# Altium PCB PCB2.PcbDoc
Units mm, origin at the board's own origin, x right, y up, seen from the top; angles counter-clockwise.
Board outline 25 x 89 mm, 2 copper layers (Top Layer, Bottom Layer); 12 components, 20 nets, 111 pads, 0 vias.
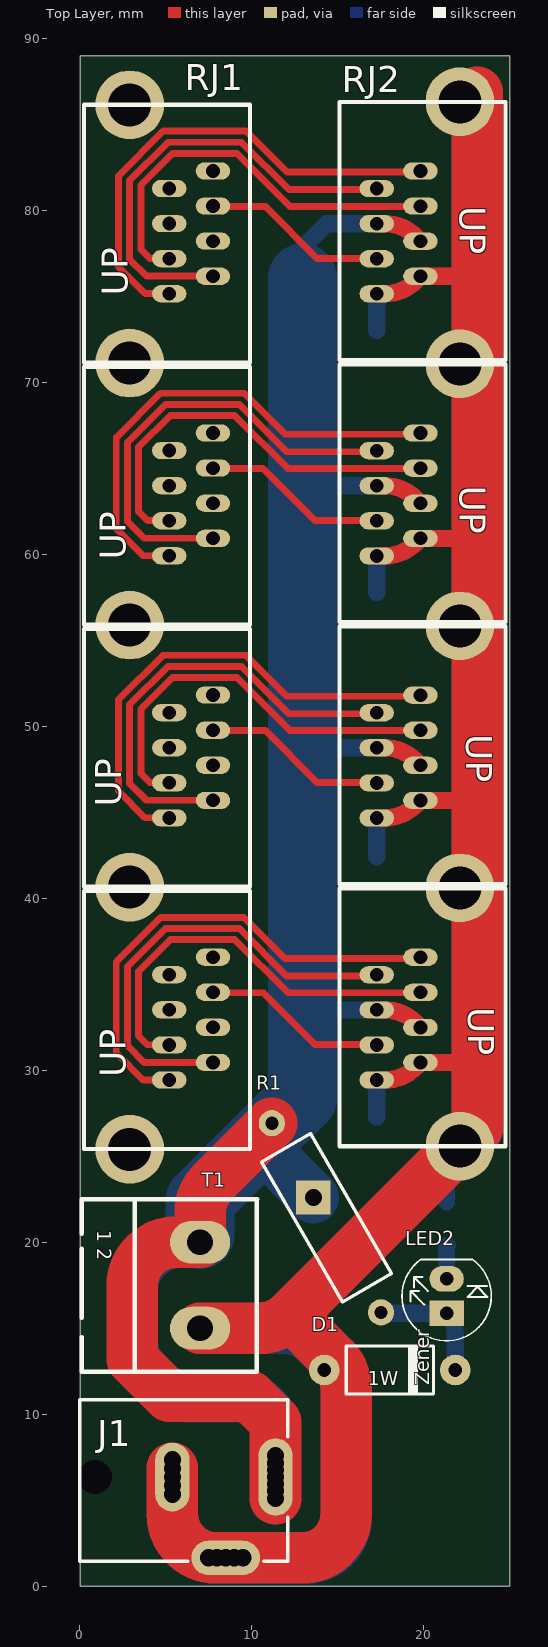
[diagram p0: Top Layer view]
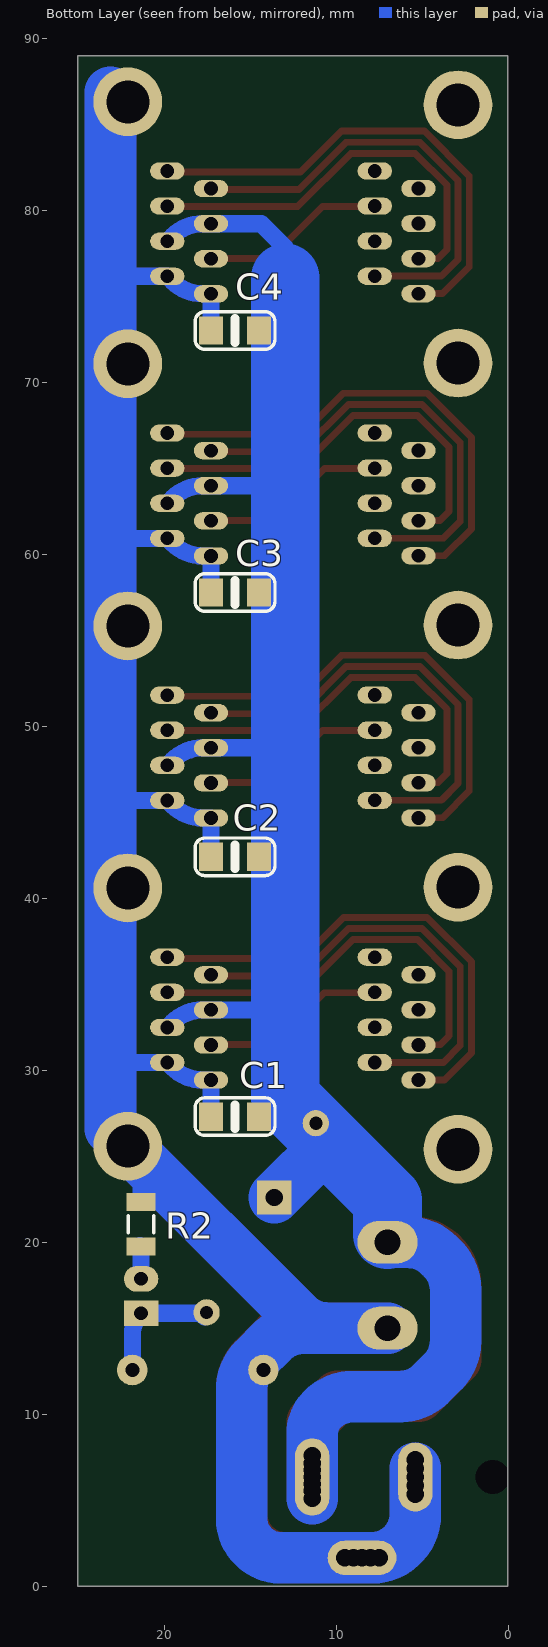
[diagram p1: Bottom Layer view, seen from below]
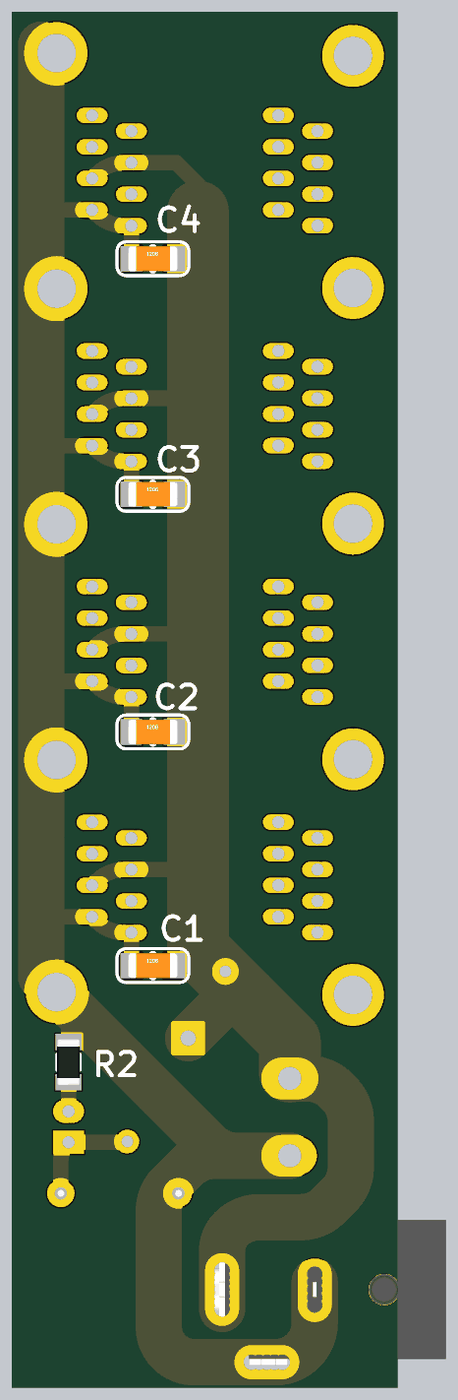
[diagram p2: 3D render of the assembled board from below, using the file's embedded part models]

## Layer stack, top to bottom
Top Solder: solder mask 0.0102, Solder Resist, Dk 3.5
Top Layer: signal copper 0.0356
Dielectric 1: dielectric 0.32, FR-4, Dk 4.8
Bottom Layer: signal copper 0.0356
Bottom Solder: solder mask 0.0102, Solder Resist, Dk 3.5

## Board outline
0.019,-0.003 25.019,-0.003 25.019,89 0.019,89

## Design rules (kind name [scope] priority, off if disabled: settings)
Clearance [All] p1: gap=0.25 ignorepadtopadclearanceinfootprint=FALSE
PolygonConnect [All] p1: connectstyle=Relief reliefconductorwidth=0.4 reliefentries=4 polygonreliefangle="90 Angle" airgapwidth=0.254
RoutingVias [All] p1: holewidth=0.711 width=1.27 viastyle="Through Hole" minholewidth=0.711 minwidth=1.27 maxholewidth=0.711 maxwidth=1.27
SolderMaskExpansion [All] p1: expansion=0.102
Width [All] p1: maxlimit=4 minlimit=0.254 preferedwidth=1.5
30 further rules are at their usual default settings.

## Components (designator, comment, footprint, x,y, rotation, side; value= is the part's Value field where it differs from the comment)
C1 "Capacitor SMD" "1206 Capacitor" 15.875,27.305 r180 bottom
C2 "Capacitor SMD" "1206 Capacitor" 15.875,42.418 r180 bottom
C3 "Capacitor SMD" "1206 Capacitor" 15.875,57.785 r180 bottom
C4 "Capacitor SMD" "1206 Capacitor" 15.875,73.025 r180 bottom
D1 "Diode Zener" "Diode 1W" 18.034,12.573 r0 top
J1 "Power Jack" "Power Jack" -3.111,6.35 r0 top locked
LED2 "Red" LED-5mm 21.339,15.875 r90 top
R1 "330R" Res-(1/2) 11.176,26.924 r300 top
R2 "330R" "RES 1206 (3216X08L)" 21.339,22.355 r270 bottom
RJ1 "" rj45-w57-4 5.207,29.44 r90 top locked
RJ2 "" rj45-w57-4 19.812,82.296 r270 top locked
T1 "Phoenix terminal" "phoenix terminal 2" -4.68,22.495 r270 top

## Footprints (in the part's own frame and the unit in brackets; to place one, negate y for a bottom-side part, rotate by r counter-clockwise, add the part's x,y. Pads: shape width x height; smd on the part's side, far side on the other; paste and mask are expansions set on the pad)
"1206 Capacitor" [mil]
  rect 55x65 smd: 1(-55,0) 2(55,0)
  silkscreen extent -92,-43 92,43, body extent -63,-31 63,31, height 39
"Diode 1W" [mil]
  round 70 hole 31.5: 1(-150,0) 2(150,0)
  silkscreen extent -100,-55 100,55, body extent -166,-52 165,52, height 131
LED-5mm [mm]
  rect 1.5x2 hole 0.8: 1(0,0)
  oval 1.5x2 hole 0.8: 2(2,0)
  silkscreen extent -1.6,-2.6 3.13,2.6
"phoenix terminal 2" [mm] "2 terminals"
  oval 2.5x3.5 hole 1.5: 1(2.493,11.684) 2(7.493,11.684)
  silkscreen extent 0,4.81 10.03,15
"Power Jack" [mm] "Power Adaptor Jack"
  round 1.5 hole 1: 1(14.5,-1.25) 1(14.5,-0.8) 1(14.5,-0.4) 1(14.5,0.4) 1(14.5,0.8) 1(14.5,1.25) 2(8.5,-1) 2(8.5,1) 2(8.5,-0.5) 2(8.5,0.5) 3(10.6,-4.7) 3(11.1,-4.7) 3(12.1,-4.7) 3(12.6,-4.7)
  oval 2x4.5 hole 1: 1(14.5,0)
  oval 2x4 hole 1: 2(8.5,0)
  oval 4x2 hole 1: 3(11.6,-4.7)
  round 1.9 hole 2: MH(4,0)
  silkscreen extent 3.11,-4.9 15.2,4.5, body extent 0,-4.9 15.2,4.5, height 11
"RES 1206 (3216X08L)" [mm] "Chip Resistor, 2-Leads, Body 3.2x1.6mm, IPC High Density _ (0.125 W)"
  rect 1.05x1.7 smd: 1(0,0) 2(2.596,0)
  silkscreen extent 0.8,-0.75 1.8,0.75, body extent -0.23,-0.76 2.82,0.76, height 0.6
Res-(1/2) [mil]
  round 60 hole 30: 1(0,0) 2(500,0)
  silkscreen extent 65,-65 435,65, body extent -12,-66 513,66, height 136
rj45-w57-4 [mm]
  oval 1x2 hole 0.8: 1(0,0) 2(1.02,-2.54) 3(2.04,0) 4(3.06,-2.54) 5(4.08,0) 6(5.1,-2.54) 7(6.12,0) 8(7.14,-2.54) 9(15.24,0) 10(16.26,-2.54) 11(17.28,0) 12(18.3,-2.54) 13(19.32,0) 14(20.34,-2.54) 15(21.36,0) 16(22.38,-2.54) 17(30.48,0) 18(31.5,-2.54) 19(32.52,0) 20(33.54,-2.54) 21(34.56,0) 22(35.58,-2.54) 23(36.6,0) 24(37.62,-2.54) 25(45.72,0) 26(46.74,-2.54) 27(47.76,0) 28(48.78,-2.54) 29(49.8,0) 30(50.82,-2.54) 31(51.84,0) 32(52.86,-2.54)
  round 4 hole 2.5: 33(-4.03,2.3) 34(11.21,2.3) 35(26.45,2.3) 36(41.69,2.3) 37(56.706,2.3)
  silkscreen extent -4.01,-4.7 56.71,4.95

## Part data
D1: "Zener Diode", Voltage=12V, Company=E.P.I.L, Design Date=2011/11/02, Designer="Saeid Jorablo"
LED2: library part LED, "LED", Adding Date=1387/12/22, Color=Red, Designer="Saeid Jorablo", Organazation=ControTec, Size="SMD 1206"
R1 R2: library part Resistor, "Resistor", Power="1/8 W", Tolerance=5%
RJ1 RJ2: library part RJ45-w57-4
T1: library part "Phoenix terminal 2", "Terminal 2 Pin", ComponentLinkURL=www.picpars.com, Designer="Seyed Mohsen Ghasemain", E-mail=picpars@gmail.com
C1 C2 C3 C4: =100nF
J1: Adding Date=10/21/2009, Company=Personal, Designer="Saeid Jorablo", Project Name=Laser

## Free pads (board coordinates)
  rect 2x2 hole 1: 3(13.589,22.606)

## Nets (pads, with @x,y where several pads share a name; then routed paths per layer and width w, separated by ;. In a path a pad name is that pad's centre, name@x,y a point inside that pad or via, vN(x,y) a via of type N, cw(c..) or ccw(c..) an arc to the next point about the centre after c; other vN are vias at no path point)
GND: C1.1 C2.1 C3.1 C4.1 D1.1 J1.2 J1.3 R2.1 RJ2.7 RJ2.8 RJ2.15 RJ2.16 RJ2.23 RJ2.24 RJ2.31 RJ2.32 RJ2.33 RJ2.34 RJ2.35 RJ2.36 RJ2.37 T1.2 | length 271.8
  Top Layer w1: RJ2.32 17.74,29.436 ccw(c17.74,31.976) 19.536,30.18 RJ2.31 22.865,30.456 cw(c22.865,30.104) 23.114,30.353 ; RJ2.24 17.74,44.676 ccw(c17.74,47.216) 19.536,45.42 RJ2.23 22.865,45.696 cw(c22.865,45.344) 23.114,45.593 ; RJ2.16 17.74,59.916 ccw(c17.74,62.456) 19.536,60.66 RJ2.15 22.865,60.936 cw(c22.865,60.584) 23.114,60.833 ; RJ2.8 17.74,75.156 ccw(c17.74,77.696) 19.536,75.9 RJ2.7 22.252,76.176 cw(c22.252,74.957) 23.114,75.819
  Top Layer w3: J1.2@5.389,6.85 5.389,5.85 5.389,4.19 ccw(c7.929,4.19) 7.929,1.65 7.989,1.65 8.489,1.65 8.989,1.65 9.489,1.65 12.954,1.65 ccw(c12.954,4.19) 15.494,4.19 15.494,11.468 ccw(c12.954,11.468) 14.75,13.264 12.268,15.746 ; T1.2 10.472,15.002 ccw(c10.472,17.542) 12.268,15.746 ; RJ2.33@23.114,86.868 23.114,75.819 23.114,60.833 23.114,45.593 23.114,30.353 23.114,26.592 RJ2.37 12.268,15.746
  Bottom Layer w1: C1.1 RJ2.32 17.74,29.436 ccw(c17.74,31.976) 19.536,30.18 RJ2.31 22.757,30.456 23.114,30.099 ; C2.1 RJ2.24 17.74,44.676 ccw(c17.74,47.216) 19.536,45.42 RJ2.23 23.09,45.696 23.114,45.72 ; C3.1 RJ2.16 17.74,59.916 ccw(c17.74,62.456) 19.536,60.66 RJ2.15 22.757,60.936 23.114,60.579 ; C4.1 RJ2.8 17.74,75.156 ccw(c17.74,77.696) 19.536,75.9 RJ2.7 22.963,76.176 23.114,76.327 ; R2.1 21.339,23.765 cw(c23.879,23.765) RJ2.37@22.083,25.561
  Bottom Layer w3: J1.2@5.389,6.85 5.389,5.85 5.389,4.19 ccw(c7.929,4.19) 7.929,1.65 7.989,1.65 8.489,1.65 8.989,1.65 9.489,1.65 13.207,1.65 ccw(c13.207,3.937) 15.494,3.937 15.494,11.41 ccw(c12.954,11.41) 14.75,13.206 13.698,14.258 ccw(c11.902,12.462) 11.902,15.002 10.472,15.002 ; T1.2 10.472,15.002 ; 23.114,76.327 23.114,60.579 23.114,45.72 23.114,30.099 23.114,26.592 22.083,25.561 12.268,15.746 cw(c10.472,17.542) 10.472,15.002
NetD1_2: D1.2 LED2.1 R1.2 | length 7.2
  Bottom Layer w1: R1.2@17.653,15.671 cw(c18.144,15.18) 18.144,15.875 LED2.1 cw(c20.12,14.656) 21.844,14.656 D1.2
NetLED2_2: LED2.2 R2.2 | length 2
  Bottom Layer w1: LED2.2 R2.2 R2.2@21.392,19.812
RX+p1: RJ1.27 RJ2.3 | length 24
  Top Layer w0.4: RJ1.27@5.207,77.206 4.08,77.206 3.556,77.73 3.556,81.478 5.396,83.318 9.144,83.318 12.23,80.232 RJ2.3@19.069,80.232 ; RJ1.27@5.207,77.216 RJ1.27@5.988,77.216
RX+p2: RJ1.19 RJ2.11 | length 24
  Top Layer w0.4: RJ1.19@5.08,61.966 3.953,61.966 3.429,62.49 3.429,66.238 5.269,68.078 9.017,68.078 12.103,64.992 RJ2.11@18.942,64.992 ; RJ1.19@5.08,61.976 RJ1.19@5.861,61.976
RX+p3: RJ1.11 RJ2.19 | length 24
  Top Layer w0.4: RJ1.11@5.207,46.726 4.08,46.726 3.556,47.25 3.556,50.998 5.396,52.838 9.144,52.838 12.23,49.752 RJ2.19@19.069,49.752 ; RJ1.11@5.207,46.736 RJ1.11@5.988,46.736
RX+p4: RJ1.3 RJ2.27 | length 24
  Top Layer w0.4: RJ1.3@5.08,31.486 3.953,31.486 3.429,32.01 3.429,35.758 5.269,37.598 9.017,37.598 12.103,34.512 RJ2.27@18.942,34.512 ; RJ1.3@5.08,31.496 RJ1.3@5.861,31.496
RX-p1: RJ1.30 RJ2.6 | length 10.3
  Top Layer w0.4: RJ1.30@8.02,80.232 10.795,80.232 13.811,77.216 RJ2.6@17.037,77.216
RX-p2: RJ1.22 RJ2.14 | length 10.3
  Top Layer w0.4: RJ1.22@7.893,64.992 10.668,64.992 13.684,61.976 RJ2.14@16.91,61.976
RX-p3: RJ1.14 RJ2.22 | length 10.3
  Top Layer w0.4: RJ1.14@8.02,49.752 10.795,49.752 13.811,46.736 RJ2.22@17.037,46.736
RX-p4: RJ1.6 RJ2.30 | length 10.3
  Top Layer w0.4: RJ1.6@7.893,34.512 10.668,34.512 13.684,31.496 RJ2.30@16.91,31.496
TX+p1: RJ1.25 RJ2.1 | length 28.5
  Top Layer w0.4: RJ1.25@5.207,75.166 3.81,75.166 2.256,76.72 2.256,82.017 4.857,84.618 9.682,84.618 12.068,82.232 RJ2.1@19.069,82.232 ; RJ1.25@5.225,75.216 RJ1.25@5.988,75.216
TX+p2: RJ1.17 RJ2.9 | length 28.5
  Top Layer w0.4: RJ1.17@5.08,59.926 3.683,59.926 2.129,61.48 2.129,66.796 4.711,69.378 9.555,69.378 11.941,66.992 RJ2.9@18.942,66.992 ; RJ1.17@5.098,59.976 RJ1.17@5.861,59.976
TX+p3: RJ1.9 RJ2.17 | length 28.5
  Top Layer w0.4: RJ1.9@5.207,44.686 3.81,44.686 2.256,46.24 2.256,51.556 4.838,54.138 9.682,54.138 12.068,51.752 RJ2.17@19.069,51.752 ; RJ1.9@5.225,44.736 RJ1.9@5.988,44.736
TX+p4: RJ1.1 RJ2.25 | length 28.5
  Top Layer w0.4: RJ1.1@5.08,29.446 3.683,29.446 2.129,31 2.129,36.316 4.711,38.898 9.555,38.898 11.941,36.512 RJ2.25@18.942,36.512 ; RJ1.1@5.098,29.496 RJ1.1@5.861,29.496
TX-p1: RJ1.26 RJ2.2 | length 26.3
  Top Layer w0.4: RJ1.26@7.747,76.186 3.88,76.186 2.906,77.16 2.906,81.748 5.126,83.968 9.413,83.968 12.165,81.216 RJ2.2@17.037,81.216 ; RJ1.26@7.747,76.266 7.986,76.266 RJ1.26@8.02,76.232
TX-p2: RJ1.18 RJ2.10 | length 26.3
  Top Layer w0.4: RJ1.18@7.62,60.946 3.753,60.946 2.779,61.92 2.779,66.508 4.999,68.728 9.286,68.728 12.038,65.976 RJ2.10@16.91,65.976 ; RJ1.18@7.62,61.026 7.859,61.026 RJ1.18@7.893,60.992
TX-p3: RJ1.10 RJ2.18 | length 26.3
  Top Layer w0.4: RJ1.10@7.747,45.706 3.88,45.706 2.906,46.68 2.906,51.268 5.126,53.488 9.413,53.488 12.165,50.736 RJ2.18@17.037,50.736 ; RJ1.10@7.747,45.786 7.986,45.786 RJ1.10@8.02,45.752
TX-p4: RJ1.2 RJ2.26 | length 26.3
  Top Layer w0.4: RJ1.2@7.62,30.466 3.753,30.466 2.779,31.44 2.779,36.028 4.999,38.248 9.286,38.248 12.038,35.496 RJ2.26@16.91,35.496 ; RJ1.2@7.62,30.546 7.859,30.546 RJ1.2@7.893,30.512
VCC: C1.2 C2.2 C3.2 C4.2 J1.1 pad.3 R1.1 RJ2.4 RJ2.5 RJ2.12 RJ2.13 RJ2.20 RJ2.21 RJ2.28 RJ2.29 T1.1 | length 161.3
  Top Layer w1: RJ2.28 17.74,33.516 cw(c17.74,30.976) 19.536,32.772 RJ2.29 ; RJ2.20 17.74,48.756 cw(c17.74,46.216) 19.536,48.012 RJ2.21 ; RJ2.12 17.74,63.996 cw(c17.74,61.456) 19.536,63.252 RJ2.13 ; RJ2.4 17.74,79.236 cw(c17.74,76.696) 19.536,78.492 RJ2.5
  Top Layer w3: R1.1 7.748,23.496 ccw(c9.544,21.7) 7.004,21.7 T1.1 5.588,20.002 ccw(c5.588,17.462) 3.048,17.462 3.048,13.208 5.207,11.049 9.906,11.049 11.389,9.566 11.389,7.6 11.389,7.15 11.389,6.75 11.389,6.35 11.389,5.95 11.389,5.55 J1.1@11.389,5.1
  Bottom Layer w1: 12.954,33.655 13.093,33.516 RJ2.28 17.74,33.516 cw(c17.74,30.976) 19.536,32.772 RJ2.29 ; 12.954,48.514 13.196,48.756 RJ2.20 17.74,48.756 cw(c17.74,46.216) 19.536,48.012 RJ2.21 ; 12.954,64.135 13.093,63.996 RJ2.12 17.74,63.996 cw(c17.74,61.456) 19.536,63.252 RJ2.13 ; 12.954,76.073 12.954,77.839 14.351,79.236 RJ2.4 17.74,79.236 cw(c17.74,76.696) 19.536,78.492 RJ2.5
  Bottom Layer w3: T1.1 5.814,20.002 ccw(c5.814,17.462) 4.018,19.258 3.792,19.032 ccw(c5.588,17.236) 3.048,17.236 3.048,14.26 ccw(c5.588,14.26) 3.792,12.464 4.485,11.771 ccw(c6.281,13.567) 6.281,11.027 9.003,11.027 cw(c9.003,8.487) 10.799,10.283 cw(c9.374,8.858) 11.389,8.858 11.389,7.6 11.389,7.15 11.389,6.75 11.389,6.35 11.389,5.95 11.389,5.55 J1.1@11.389,5.1 ; 10.377,25.818 pad.3
  Bottom Layer w4: T1.1@7.004,20.447 7.004,22.445 10.377,25.818 12.954,28.395 12.954,33.655 12.954,48.514 12.954,64.135 12.954,76.073
pads on no net: J1.MH RJ1.4 RJ1.5 RJ1.7 RJ1.8 RJ1.12 RJ1.13 RJ1.15 RJ1.16 RJ1.20 RJ1.21 RJ1.23 RJ1.24 RJ1.28 RJ1.29 RJ1.31 RJ1.32 RJ1.33 RJ1.34 RJ1.35 RJ1.36 RJ1.37
copper on no net: | length 11
  Bottom Layer w3: 23.114,75.819 23.114,86.868

## Silkscreen, mask and mechanical layers (free items; w line width, h text height)
Mechanical 1:
  the board outline again, w0.254

## Text inside footprints (layer, text, board x,y; h text height)
D1: Top Overlay "Zener" at 20.32,11.684 h0.8 r90; Top Overlay "1W" at 16.764,11.684 h0.8
RJ1: Top Overlay "UP" at 2.667,29.591 h1.52 r90; Top Overlay "UP" at 2.413,45.339 h1.52 r90; Top Overlay "UP" at 2.667,59.69 h1.52 r90; Top Overlay "UP" at 2.794,75.057 h1.52 r90
RJ2: Top Overlay "UP" at 22.098,80.264 h1.52 r270; Top Overlay "UP" at 22.098,64.008 h1.52 r270; Top Overlay "UP" at 22.479,49.53 h1.52 r270; Top Overlay "UP" at 22.606,33.655 h1.52 r270
T1: Top Overlay "1 2" at 1.016,20.701 h0.8 r270